# EAGLE board Pedal Box Board rev4 (EAGLE 8.2.1)
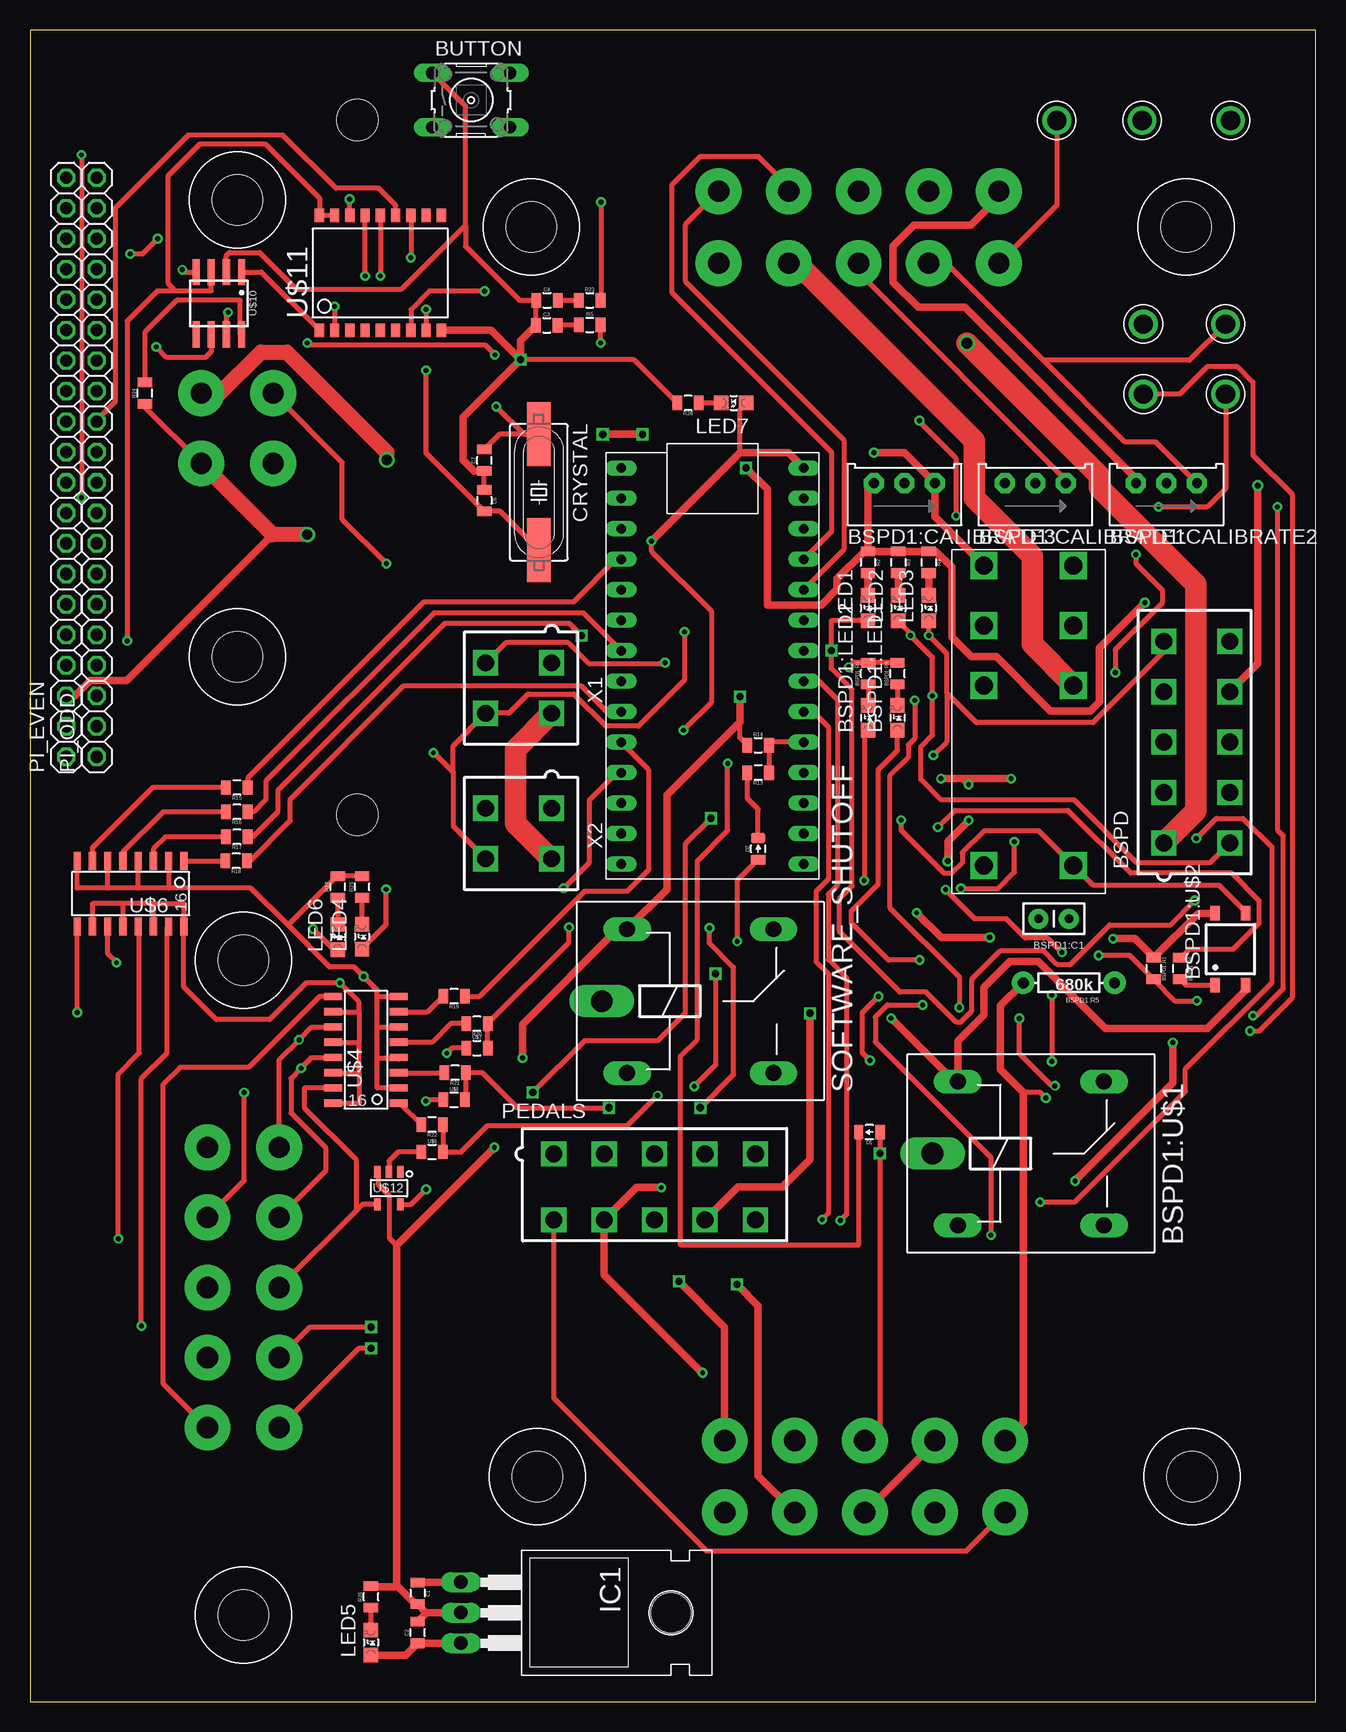
[diagram p0: board, top side]
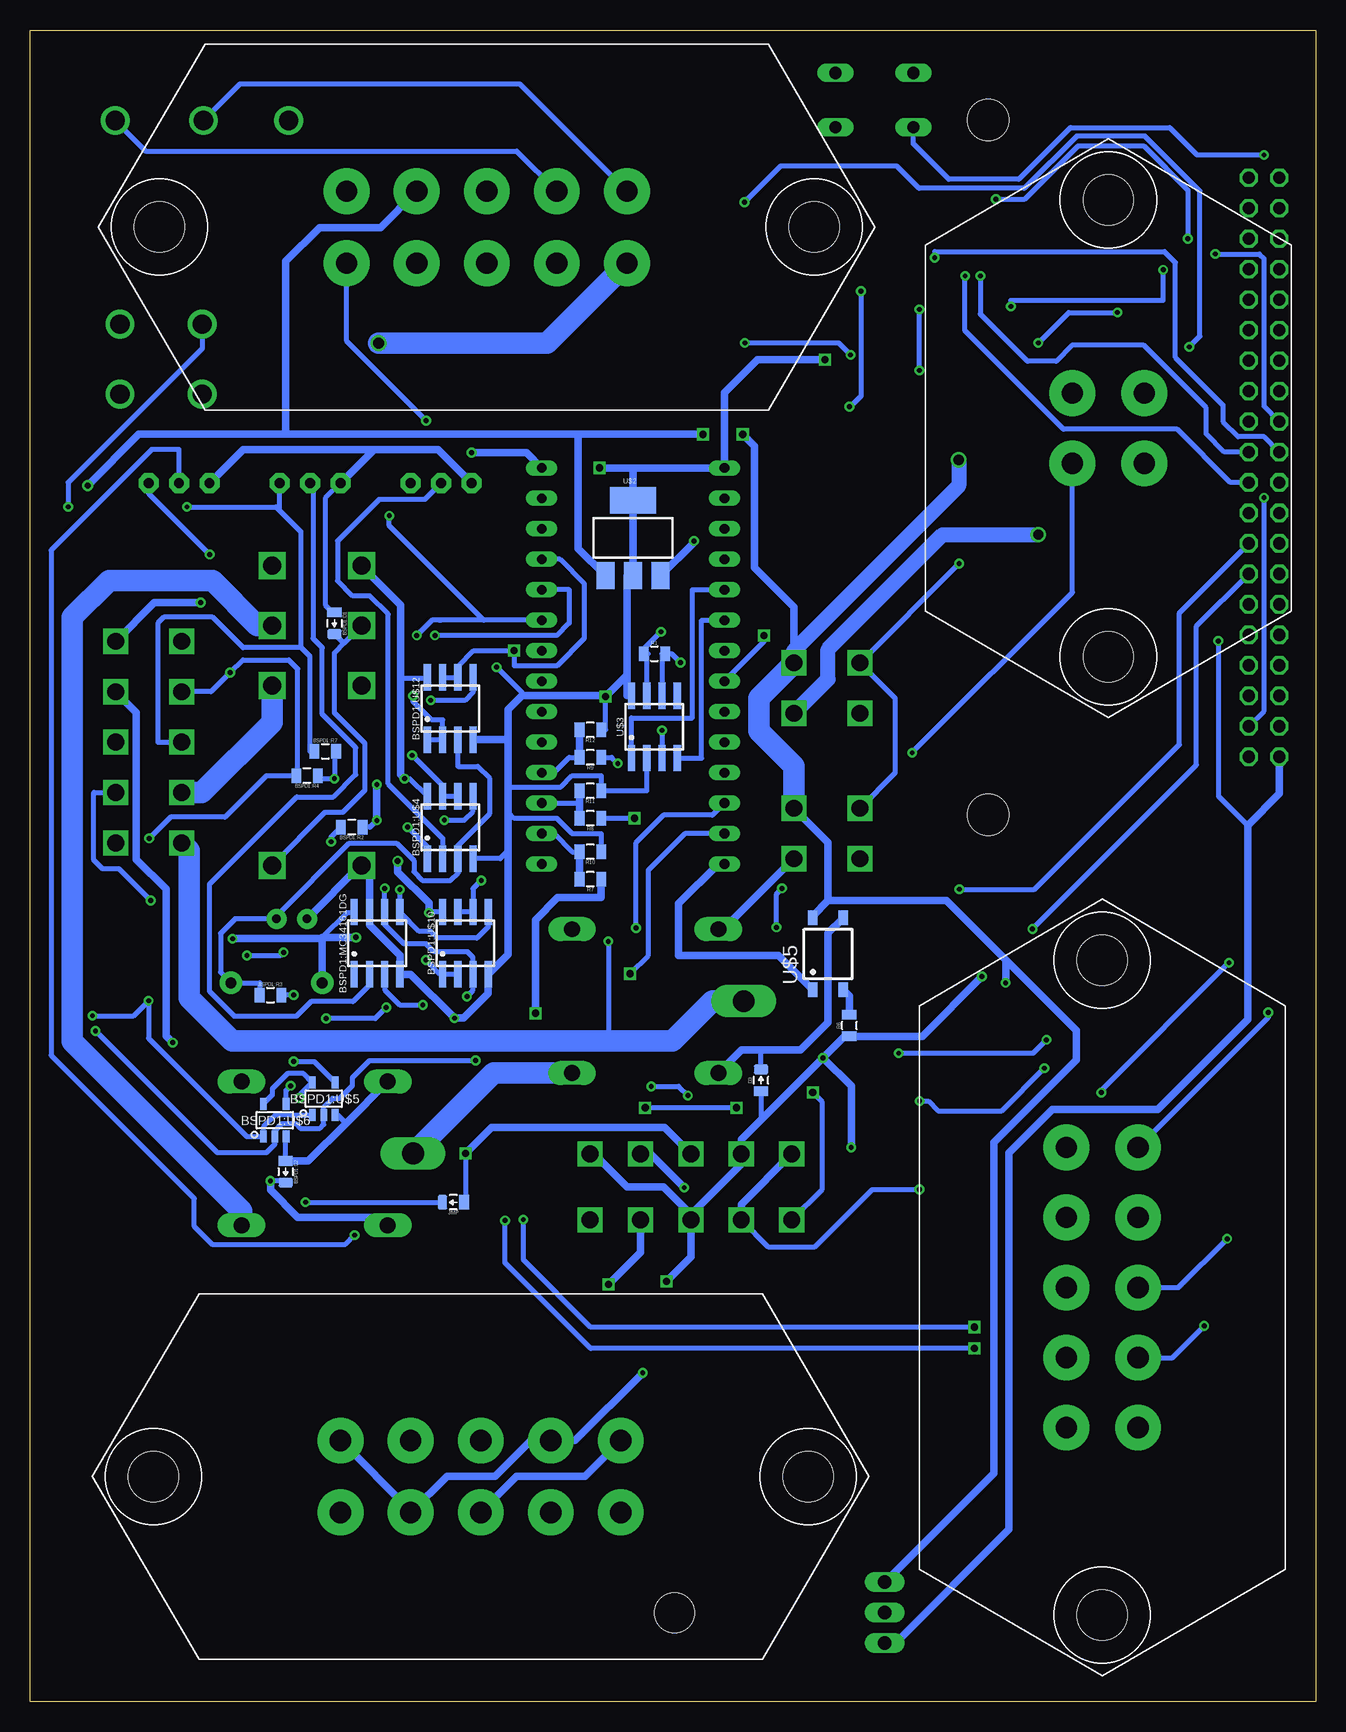
[diagram p1: board, bottom side, seen from below]

Size 107.17 x 139.37 mm. Coordinates in mm from the lower left corner, seen from the top.
Outline: 0,0 107.17,0 107.17,139.37 0,139.37 0,0
Copper layers (1*16): Top 0.035mm / dielectric 1.5mm / Bottom 0.035mm
Design rules "default *": minimum track width 6mil, minimum drill 15mil, track to track 8mil, track to pad 8mil, pad to pad 8mil, via to via 8mil, smd to smd 8mil, copper to edge 40mil, drill to drill 8mil, minimum pad ring 10mil, minimum via ring 8mil, stop-mask expansion 4mil, vias tented up to drill 0mil, thermal gap 10mil
Holes 3.43 mm at 27.28,131.88 27.28,73.96
tKeepout: area 23,69.7 to 31.4,78.1; area 23.1,127.6 to 31.5,136

## Footprints (pad centres in the part's own frame; a part is rotated, then mirrored left to right if it is on the bottom)
MINIFIT_5566-10 = drill 1.4 square: 1 8.4,-2.75; 2 4.2,-2.75; 3 0,-2.75; 4 -4.2,-2.75; 5 -8.4,-2.75; 6 8.4,2.75; 7 4.2,2.75; 8 0,2.75; 9 -4.2,2.75; 10 -8.4,2.75
CAP-PTH-SMALLEZ = drill 0.7 pad 1.651: 1 0,0; 2 2.54,0
TRIMPOT_3296 = drill 0.813 pad 1.676 octagon: 1 2.54,1.27; 2 0,1.27; 3 -2.54,1.27
0805_D = smd 0.8 x 1.2: A -0.9,0; C 0.9,0
LED-805 = smd 1.2 x 1.2: A 0,-1.05; C 0,1.05
SOIC-08 = smd 0.6 x 2.2: 1 -1.905,-2.6; 2 -0.635,-2.6; 3 0.635,-2.6; 4 1.905,-2.6; 5 1.905,2.6; 6 0.635,2.6; 7 -0.635,2.6; 8 -1.905,2.6
0805 = smd 0.8 x 1.2: 1 -0.9,0; 2 0.9,0
AXIAL-0.3EZ = drill 0.9 pad 1.88: P$1 -3.81,0; P$2 3.81,0
ZF112 = drill 1.321 long: 1 4.064,14.884; 2 4.064,2.896; O 16.256,14.884; S 16.256,2.896 | drill 1.803 long: P 1.956,8.89
SOP04 = smd 0.8 x 1.2: 1 -1.27,-3; 2 1.27,-3; 3 1.27,3; 4 -1.27,3
JW2SN = drill 1.5 square: 2 10.008,0; 3 5.004,0; 4 0,0; 5 0,7.493; 6 5.004,7.493; 7 10.008,7.493; COIL+ 25.019,0; COIL- 25.019,7.493
SOT-23-5 = smd 1 x 0.55: 1 -1.35,0.95; 2 -1.35,0; 3 -1.35,-0.95; 4 1.35,-0.95; 5 1.35,0.95
TEST_POINT = drill 1.6: P$1 0,0
B3F-10XX = drill 1.016 long: 1 -3.251,2.261; 2 3.251,2.261; 3 -3.251,-2.261; 4 3.251,-2.261
HC49UP = smd 5.334 x 1.93: 1 -4.826,0; 2 4.826,0
TO-220-H = drill 1.118 long: 1 -2.54,-6.35; 2 0,-6.35; 3 2.54,-6.35 | hole 3.302: 0,11.176
1X20 = drill 1.016 octagon: 1 0,0; 2 2.54,0; 3 5.08,0; 4 7.62,0; 5 10.16,0; 6 12.7,0; 7 15.24,0; 8 17.78,0; 9 20.32,0; 10 22.86,0; 11 25.4,0; 12 27.94,0; 13 30.48,0; 14 33.02,0; 15 35.56,0; 16 38.1,0; 17 40.64,0; 18 43.18,0; 19 45.72,0; 20 48.26,0
TEENSY_3.2_SIMPLE = drill 0.8 long: 3.3V 16.51,29.21; A0 16.51,3.81; A1 16.51,6.35; A2 16.51,8.89; A3 16.51,11.43; A4 16.51,13.97; A5 16.51,16.51; A6 16.51,19.05; A7 16.51,21.59; A8 16.51,24.13; A9 16.51,26.67; AGND 16.51,31.75; D0(RX1) 1.27,31.75; D1(TX1) 1.27,29.21; D2 1.27,26.67; D3(CANTX) 1.27,24.13; D4(CANRX) 1.27,21.59; D5 1.27,19.05; D6 1.27,16.51; D7(RX3) 1.27,13.97; D8(TX3) 1.27,11.43; D9(RX2) 1.27,8.89; D10(TX2) 1.27,6.35; D11 1.27,3.81; D12 1.27,1.27; D13 16.51,1.27; GND 1.27,34.29; VIN 16.51,34.29
SOT223 = smd 1.5 x 2.235: 1 -2.3,-3.15; 2 0,-3.15; 3 2.3,-3.15 | smd 3.8 x 2.2: 4 0,3.15
SOIC-16 = smd 0.61 x 1.524: 1 -4.445,-2.794; 2 -3.175,-2.794; 3 -1.905,-2.794; 4 -0.635,-2.794; 5 0.635,-2.794; 6 1.905,-2.794; 7 3.175,-2.794; 8 4.445,-2.794; 9 4.445,2.667; 10 3.175,2.667; 11 1.905,2.667; 12 0.635,2.667; 13 -0.635,2.667; 14 -1.905,2.667; 15 -3.175,2.667; 16 -4.445,2.667
SOIC-18W = smd 0.762 x 1.143: 1 -5.08,-4.788; 2 -3.81,-4.788; 3 -2.54,-4.788; 4 -1.27,-4.788; 5 0,-4.788; 6 1.27,-4.788; 7 2.54,-4.788; 8 3.81,-4.788; 9 5.08,-4.788; 10 5.08,4.788; 11 3.81,4.788; 12 2.54,4.788; 13 1.27,4.788; 14 0,4.788; 15 -1.27,4.788; 16 -2.54,4.788; 17 -3.81,4.788; 18 -5.08,4.788
MINIFIT_5566-4 = drill 1.4 square: 1 2.1,-2.75; 2 -2.1,-2.75; 3 2.1,2.75; 4 -2.1,2.75
MX150L_VERTICAL-4 = drill 1.778 pad 3.81: 1 -2.921,2.997; 2 2.921,2.997; 3 -2.921,-2.997; 4 2.921,-2.997 | hole 4.191: -19.05,0; 19.05,0
MX150L_VERTICAL-10 = drill 1.778 pad 3.81: 1 -11.684,2.997; 2 -5.842,2.997; 3 0,2.997; 4 5.842,2.997; 5 11.684,2.997; 6 -11.684,-2.997; 7 -5.842,-2.997; 8 0,-2.997; 9 5.842,-2.997; 10 11.684,-2.997 | hole 4.191: -27.292,0; 27.292,0

## Placement (x,y rotation side)
BSPD  MINIFIT_5566-10  [MINIFIT_5566-10]  97.28,80.01 270 top
BSPD1:C1  .47u  [CAP-PTH-SMALLEZ]  86.61,65.28 180 top
BSPD1:CALIBRATE1  [TRIMPOT_3296]  83.82,100.33 0 top
BSPD1:CALIBRATE2  [TRIMPOT_3296]  94.74,100.33 0 top
BSPD1:CALIBRATE3  [TRIMPOT_3296]  72.9,100.33 0 top
BSPD1:D1  DIODE0805  [0805_D]  81.79,89.92 270 bottom
BSPD1:D2  DIODE0805  [0805_D]  85.85,44.2 270 bottom
BSPD1:LED1  [LED-805]  72.31,82.04 0 top
BSPD1:LED2  [LED-805]  69.88,82.04 0 top
BSPD1:MC34161DG  [SOIC-08]  78.23,63.25 0 bottom
BSPD1:R1  10k  [0805]  93.68,61.14 270 top
BSPD1:R2  10k  [0805]  80.34,72.92 180 bottom
BSPD1:R3  330  [0805]  87.12,58.93 0 bottom
BSPD1:R4  10k  [0805]  84.07,77.22 180 bottom
BSPD1:R5  680k  [AXIAL-0.3EZ]  86.61,59.94 180 top
BSPD1:R6  680  [0805]  95.89,61.14 270 top
BSPD1:R7  10k  [0805]  82.55,79.25 0 bottom
BSPD1:R8  330  [0805]  72.31,85.72 90 top
BSPD1:R9  330  [0805]  69.88,85.72 90 top
BSPD1:U$1  G5LE  [ZF112]  73.28,36.83 0 top
BSPD1:U$2  CPC1002N  [SOP04]  100.08,62.74 0 top
BSPD1:U$3  JW2SN-DC5V  [JW2SN]  79.5,94.74 270 top
BSPD1:U$4  MCP6002SOIC  [SOIC-08]  72.14,72.9 0 bottom
BSPD1:U$5  SN74AHC1G09  [SOT-23-5]  82.68,50.29 90 bottom
BSPD1:U$6  SN74LVC1G08  [SOT-23-5]  86.77,48.49 90 bottom
BSPD1:U$10  MCP6002SOIC  [SOIC-08]  70.87,63.25 0 bottom
BSPD1:U$11  TEST_POINT  [TEST_POINT]  92.81,114.86 0 top
BSPD1:U$12  MCP6002SOIC  [SOIC-08]  72.14,82.8 0 bottom
BSPD1:U$13  TEST_POINT  [TEST_POINT]  92.81,109.02 0 top
BUTTON  [B3F-10XX]  36.78,133.53 0 top
C1  .33uF  [0805]  32.31,9.07 270 top
C2  .1uF  [0805]  32.31,5.79 90 top
C3  560pF  [0805]  43.08,114.76 0 top
C4  560pF  [0805]  43.1,116.84 0 top
C6  22pF  [0805]  37.87,100.15 270 top
C7  22pF  [0805]  37.87,103.5 90 top
CRYSTAL  16MHz  [HC49UP]  42.42,100.84 270 top
D1  DIODE0805  [0805_D]  69.98,47.5 180 top
D2  DIODE0805  [0805_D]  60.71,71.12 90 top
D3  DIODE0805  [0805_D]  46.23,51.82 90 bottom
IC1  [TO-220-H]  42.27,7.44 270 top
JMP  DIODE0805  [0805_D]  71.88,41.66 180 bottom
LED1  [LED-805]  69.85,91.19 0 top
LED2  [LED-805]  72.39,91.19 0 top
LED3  [LED-805]  74.93,91.19 0 top
LED4  [LED-805]  27.69,63.78 0 top
LED5  [LED-805]  28.42,4.95 0 top
LED6  [LED-805]  25.68,63.75 0 top
LED7  [LED-805]  58.67,108.28 90 top
PEDALS  MINIFIT_5566-10  [MINIFIT_5566-10]  52.07,42.93 180 top
PI_EVEN  [1X20]  3.02,78.79 90 top
PI_ODD  [1X20]  5.56,78.79 90 top
R1  120  [0805]  55.12,87.38 0 bottom
R2  150  [0805]  69.85,95 270 top
R3  150  [0805]  72.39,95 270 top
R4  150  [0805]  74.93,95 270 top
R5  100  [0805]  46.66,114.78 0 top
R6  100  [0805]  38.86,56.39 90 bottom
R7  10k  [0805]  60.45,68.58 180 bottom
R8  10k  [0805]  60.45,73.66 180 bottom
R9  10k  [0805]  60.45,78.74 180 bottom
R10  15k  [0805]  60.45,70.87 180 bottom
R11  15k  [0805]  60.45,75.95 180 bottom
R12  15k  [0805]  60.45,81.03 180 bottom
R13  43k  [0805]  60.71,77.47 180 top
R14  12k  [0805]  60.71,79.76 0 top
R15  270  [0805]  17.25,76.23 180 top
R16  270  [0805]  17.25,74.19 180 top
R17  270  [0805]  17.25,72.11 180 top
R18  270  [0805]  17.2,70.1 180 top
R19  270  [0805]  35.36,58.83 180 top
R20  270  [0805]  37.26,56.54 180 top
R21  270  [0805]  35.43,52.45 180 top
R22  270  [0805]  33.53,48.13 180 top
R23  100  [0805]  46.66,116.84 0 top
R24  4.7k  [0805]  9.58,109.09 90 top
R25  150  [0805]  27.69,67.94 90 top
R26  150  [0805]  28.42,8.76 90 top
R27  150  [0805]  25.65,67.94 90 top
R28  150  [0805]  54.86,108.28 180 top
SOFTWARE_SHUTOFF  G5LE  [ZF112]  45.72,49.53 0 top
U$1  TEENSY_3.2_SIMPLE  [TEENSY_3.2_SIMPLE]  48.01,68.58 0 top
U$2  [SOT223]  56.9,97.03 0 bottom
U$3  MCP2551  [SOIC-08]  55.12,81.28 0 bottom
U$4  TLP291-4  [SOIC-16]  27.94,54.36 90 top
U$5  CPC1002N  [SOP04]  40.64,62.36 0 bottom
U$6  TLP291-4  [SOIC-16]  8.38,67.31 180 top
U$7  JUMPER  [0805]  37.26,54.51 0 top
U$8  JUMPER  [0805]  35.36,50.19 0 top
U$9  JUMPER  [0805]  33.53,45.85 0 top
U$10  MCP2551  [SOIC-08]  15.75,116.59 180 top
U$11  MCP2515SMD  [SOIC-18W]  29.21,119.13 0 top
U$12  SN74LV1T34  [SOT-23-5]  29.92,42.82 270 top
U$13  TEST_POINT  [TEST_POINT]  99.67,114.86 0 top
U$14  TEST_POINT  [TEST_POINT]  99.67,109.02 0 top
U$15  TEST_POINT  [TEST_POINT]  85.6,131.83 0 top
U$16  TEST_POINT  [TEST_POINT]  92.71,131.83 0 top
U$17  TEST_POINT  [TEST_POINT]  100.08,131.83 0 top
X1  MINIFIT_5566-4  [MINIFIT_5566-4]  40.74,84.51 90 top
X2  MINIFIT_5566-4  [MINIFIT_5566-4]  40.74,72.39 90 top
X3  CONNECTOR-4MX150L_VERTICAL-4  [MX150L_VERTICAL-4]  17.27,106.17 270 bottom
X4  CONNECTOR-10MX150L_VERTICAL-10  [MX150L_VERTICAL-10]  69.6,18.8 0 bottom
X5  CONNECTOR-10MX150L_VERTICAL-10  [MX150L_VERTICAL-10]  69.09,122.94 180 bottom
X6  CONNECTOR-10MX150L_VERTICAL-10  [MX150L_VERTICAL-10]  17.78,34.54 270 bottom

## Library data of the parts
BSPD PEDALS X1 X2 = HyTechDevices; OC_FARNELL: unknown; OC_NEWARK: unknown
BSPD1:C1 BSPD1:CALIBRATE1-BSPD1:CALIBRATE3 BSPD1:D1 BSPD1:D2 BSPD1:LED1 BSPD1:LED2 BSPD1:MC34161DG BSPD1:R1-BSPD1:R9 BSPD1:U$1-BSPD1:U$6 BSPD1:U$10-BSPD1:U$13 C1-C4 C6 C7 D1-D3 IC1 JMP LED1-LED7 PI_EVEN PI_ODD R1-R28 SOFTWARE_SHUTOFF U$1-U$17 X3-X6 = HyTechDevices
BUTTON = HyTechDevices; MPN: B3F-1000; OC_FARNELL: 176432; OC_NEWARK: 36M3542
CRYSTAL = SparkFun-FreqCtrl

## Nets
+5V: BSPD1:CALIBRATE3.1 BSPD1:MC34161DG.8 BSPD1:R1.1 BSPD1:R2.1 BSPD1:R4.1 BSPD1:R5.P$2 BSPD1:R7.2 BSPD1:U$2.4 BSPD1:U$3.4 BSPD1:U$4.8 BSPD1:U$5.5 BSPD1:U$6.5 BSPD1:U$10.8 BSPD1:U$12.8 LED7.A PEDALS.1 PEDALS.4 PEDALS.7 U$1.VIN U$2.3 U$3.3 U$12.5 X4.1 X4.4 X4.7
+5V/1: C2.1 IC1.3 LED5.A PI_EVEN.1 U$10.3 U$11.17 U$11.18
+12V: BSPD1:D2.C BSPD1:U$1.2 BSPD.9 C1.1 IC1.1 U$2.1 U$4.10 U$4.12 U$4.14 U$4.16 U$5.4 U$6.10 U$6.12 U$6.14 U$6.16 X1.1 X2.1 X3.1 X5.9
BSPD1:N$1: BSPD1:D1.C BSPD1:U$2.3 BSPD1:U$3.3 BSPD1:U$3.COIL- BSPD1:U$4.5
BSPD1:N$2: BSPD1:R3.2 BSPD1:U$5.4
BSPD1:N$3: BSPD1:R6.2 BSPD1:U$2.1
BSPD1:N$4: BSPD1:MC34161DG.5 BSPD1:R1.2 BSPD1:U$5.1 BSPD1:U$6.1 BSPD1:U$10.5 BSPD1:U$11.P$1
BSPD1:N$5: BSPD1:CALIBRATE2.2 BSPD1:MC34161DG.3
BSPD1:N$6: BSPD1:CALIBRATE1.2 BSPD1:MC34161DG.2
BSPD1:N$7: BSPD1:CALIBRATE3.2 BSPD1:U$4.2
BSPD1:N$8: BSPD1:LED2.A BSPD1:U$10.6 BSPD1:U$10.7
BSPD1:N$9: BSPD1:R6.1 BSPD1:U$4.1
BSPD1:N$10: BSPD1:U$6.4 BSPD1:U$12.5
BSPD1:N$11: BSPD1:MC34161DG.6 BSPD1:R2.2 BSPD1:U$5.2 BSPD1:U$6.2 BSPD1:U$10.3 BSPD1:U$13.P$1
BSPD1:N$12: BSPD1:LED1.A BSPD1:U$10.1 BSPD1:U$10.2
BSPD1:N$13: BSPD1:C1.1 BSPD1:R3.1 BSPD1:R5.P$1 BSPD1:U$4.3 BSPD1:U$12.3
BSPD1:N$14: BSPD1:LED1.C BSPD1:R8.1
BSPD1:N$15: BSPD1:LED2.C BSPD1:R9.1
BSPD1:SHUTDOWN_C: BSPD1:U$1.S BSPD1:U$3.6
BUT: BUTTON.3 PI_ODD.2
CAN-H: R5.2 U$10.7
CAN-L: R23.2 U$10.6
CS: PI_EVEN.12 U$11.16
GND: BSPD1:C1.2 BSPD1:CALIBRATE1.3 BSPD1:CALIBRATE2.3 BSPD1:CALIBRATE3.3 BSPD1:D1.A BSPD1:D2.A BSPD1:MC34161DG.4 BSPD1:MC34161DG.7 BSPD1:R8.2 BSPD1:R9.2 BSPD1:U$1.1 BSPD1:U$2.2 BSPD1:U$3.COIL+ BSPD1:U$4.4 BSPD1:U$5.3 BSPD1:U$6.3 BSPD1:U$10.4 BSPD1:U$12.4 BSPD.10 BUTTON.1 C1.2 C2.2 C3.1 C4.1 C6.1 C7.1 D3.A IC1.2 PEDALS.2 PEDALS.5 PEDALS.8 PI_EVEN.3 R2.1 R3.1 R4.1 R6.1 R10.1 R11.1 R12.1 R14.1 R24.1 R25.2 R26.2 R27.2 R28.2 SOFTWARE_SHUTOFF.1 U$1.GND U$2.2 U$2.4 U$3.2 U$3.8 U$4.2 U$4.4 U$4.6 U$4.8 U$6.2 U$6.4 U$6.6 U$6.8 U$10.2 U$11.9 U$12.3 X1.2 X2.2 X3.2 X4.2 X4.5 X4.8 X5.10
INT: PI_EVEN.11 U$11.12
LED1: LED4.A PI_ODD.8
LED2: LED6.A PI_ODD.7
MISO: PI_ODD.11 U$11.15
MOSI: PI_ODD.10 U$11.14
N$1: PEDALS.9 R7.1 X4.9
N$2: U$1.D4(CANRX) U$3.4
N$3: R1.2 U$3.6 X1.3 X2.3 X3.3
N$4: R1.1 U$3.7 X1.4 X2.4 X3.4
N$5: U$1.D3(CANTX) U$3.1
N$6: R8.2 R11.2 U$1.A1
N$7: D1.C R9.1
N$8: PEDALS.6 R8.1 X4.6
N$9: R7.2 R10.2 U$1.A0
N$10: R9.2 R12.2 U$1.A2
N$11: D1.A JMP.A PEDALS.3 X4.3
N$12: D3.C SOFTWARE_SHUTOFF.2 U$5.3
N$13: D2.C R13.2
N$14: LED1.C R2.2
N$15: LED2.C R3.2
N$16: LED3.C R4.2
N$17: R21.1 U$1.D10(TX2) U$8.2
N$18: R17.1 U$1.D6
N$19: R15.2 U$6.7
N$20: R15.1 U$1.D2
N$21: R16.1 U$1.D5
N$22: R6.2 U$5.2
N$23: R18.1 U$1.D7(RX3)
N$24: R16.2 U$6.5
N$25: R20.1 U$1.D9(RX2) U$7.2
N$26: R22.1 U$1.D11 U$9.2
N$27: R21.2 U$4.3
N$28: R17.2 U$6.3
N$29: R18.2 U$6.1
N$30: R19.1 U$1.D8(TX3)
N$31: R19.2 U$4.7
N$32: R20.2 U$4.5
N$33: U$1.A5 X6.10
N$34: U$1.A4 X6.9
N$35: R22.2 U$4.1
N$36: U$4.13 U$8.1 X6.7
N$37: U$10.1 U$11.1
N$38: U$4.15 U$12.4 X6.8
N$39: U$10.4 U$11.2
N$40: C6.2 CRYSTAL.2 U$11.8
N$41: R24.2 U$10.8
N$42: C7.2 CRYSTAL.1 U$11.7
N$43: C3.2 R5.1
N$44: U$6.9 X6.1
N$45: U$6.11 X6.2
N$46: U$6.13 X6.3
N$47: U$6.15 X6.4
N$48: U$4.9 X6.5
N$49: U$4.11 U$7.1 X6.6
N$50: C4.2 R23.1
N$51: U$9.1 U$12.2
N$52: LED4.C R25.1
N$53: LED5.C R26.1
N$54: LED6.C R27.1
N$61: LED7.C R28.1
READ_CHARGE: BSPD1:U$12.1 BSPD1:U$12.2 BSPD.6 LED2.A U$1.A8 U$16.P$1 X5.6
READ_FAULT: BSPD1:U$4.6 BSPD1:U$4.7 BSPD.5 LED3.A U$1.A7 U$15.P$1 X5.5
READ_SWITCH: BSPD1:U$12.6 BSPD1:U$12.7 BSPD.7 LED1.A U$1.A9 U$17.P$1 X5.7
READ_UPSTREAM_SHUTDOWN: R13.1 R14.2 U$1.A3
SCK: PI_ODD.12 U$11.13
SHUTDOWN_A: BSPD.1 D2.A SOFTWARE_SHUTOFF.P X5.1
SHUTDOWN_B: BSPD1:U$1.P SOFTWARE_SHUTOFF.S
SHUTDOWN_D: BSPD1:U$3.7 BSPD.2 X5.2
SHUTDOWN_RELAY_CTRL: U$1.D12 U$5.1
SIGNAL_BRAKE: BSPD1:CALIBRATE2.1 BSPD1:R4.2 BSPD.4 JMP.C U$13.P$1 X5.4
SIGNAL_CURRENT: BSPD1:CALIBRATE1.1 BSPD1:R7.1 BSPD.3 U$14.P$1 X5.3

## Tracks (layer width: path | path; a pad name or v marks a point on that pad's centre or on a via)
+5V  (via drill 0.4, 0.45, 0.5)
  Top 0.406: X4.1 81.28,21.84 | v51.82,96.77 51.82,95.91 56.79,90.93 56.79,83.31 v54.48,81 | U$12.5 31.77,41.47 v33.02,42.72 | 59.18,104.14 59.18,107.74 LED7.A | v84.68,50.34 84.23,50.8 82.8,50.8
  Top 0.61: v56.08,27.43 56.03,27.43 47.87,35.59 PEDALS.7 50.57,42.88 v52.63,42.88 | v90.28,63.63 92.09,63.63 BSPD1:R1.1 97.38,65.74 BSPD1:U$2.4 | v78.25,76.48 77.77,76.96 | 77.77,76.96 v75.95,76.96 | 77.77,76.96 v81.79,76.96 | v51.82,96.77 59.18,104.14 63.25,104.14 U$1.VIN | v70.36,104.14 72.9,104.14 BSPD1:CALIBRATE3.1 75.44,98.81 BSPD1:U$3.4 | X4.1 82.8,23.32 82.8,50.8 80.9,52.7 80.9,58.04 BSPD1:R5.P$2 | v80.01,63.73 75.97,63.73 v73.91,65.79 | v76.5,70.08 76.5,71.73 v78.25,73.48
  Bottom 0.406: BSPD1:U$12.8 74.1,85.34 76.28,85.34 | v75.95,76.96 75.5,76.96 BSPD1:U$4.8 74.17,75.5 | BSPD1:R4.1 83.17,76.96 v81.79,76.96 81.79,79.25 BSPD1:R7.2 | BSPD1:U$10.8 73.91,65.85 v73.91,65.79 | BSPD1:MC34161DG.8 80.14,65.79 80.75,65.79 82.8,63.73 | 82.8,59.69 BSPD1:R5.P$2 | v54.48,81 U$3.3 | PEDALS.7 45.64,37.95 41.73,37.95 36.96,42.72 v33.02,42.72 | BSPD1:R2.1 78.82,72.92 v78.25,73.48 | v84.68,50.34 84.68,50.59 BSPD1:U$5.5 84.36,52.38 85.7,52.38 86.96,51.11 86.96,50.59 BSPD1:U$6.5
  Bottom 0.61: PEDALS.7 47.87,41.48 PEDALS.1 | 82.8,63.73 BSPD1:R5.P$2 | v56.08,27.43 61.72,21.79 X4.4 65.41,21.79 68.38,18.82 72.42,18.82 X4.7 75.44,15.95 X4.1 | PEDALS.4 55.43,45.68 v52.63,42.88 | 82.8,63.73 82.91,63.63 v90.28,63.63 | v78.25,73.48 v78.25,76.48 | U$2.3 51.82,96.66 v51.82,96.77 | U$1.VIN 65.79,104.14 v70.36,104.14 | v75.95,76.96 76.28,77.29 76.28,85.34 76.28,91.44 79.5,94.67 BSPD1:U$3.4 | 82.8,63.73 v80.01,63.73 | v76.5,70.08 76.5,69.19 73.91,66.6 v73.91,65.79
+5V/1  (via drill 0.4)
  Top 0.406: 24.09,123.95 U$11.18 | U$11.18 U$11.17 | U$10.3 15.11,117.6 12.17,117.6 | U$11.18 24.13,125.35 19.61,129.87 14.17,129.87 11.53,127.23 11.53,118.24 12.17,117.6 | 12.17,117.6 10.59,117.6 8.1,115.11 v8.1,88.44
  Top 0.61: IC1.3 32.32,4.9 C2.1 31.32,3.9 LED5.A
  Bottom 0.406: v8.1,88.44 8.1,75.51 5.66,73.08
  Bottom 0.61: IC1.3 35.03,4.9 25.55,14.38 25.55,45.77 21.92,49.4 13.16,49.4 5.66,56.9 5.66,73.08 3.02,75.72 PI_EVEN.1
+12V  (via drill 0.4, 0.5, 0.6, 0.85)
  Top 0.406: 10.41,66.55 10.29,66.42 U$6.14 | 10.41,66.55 7.75,66.55 | U$4.12 27.43,54.99 | U$4.14 27.43,52.45 | 27.43,52.45 27.43,49.91 U$4.16 | 10.41,66.55 12.83,66.55 U$6.16 12.83,59.59 15.53,56.88 19.98,56.88 23.04,59.94 v25.83,59.94 27.43,58.34 27.43,57.58 | 7.75,66.55 U$6.12 | U$6.10 5.21,66.55 7.75,66.55 | 27.43,52.45 27.43,54.99 | 27.43,57.58 27.43,54.99 | U$4.10 27.38,57.53 27.43,57.58
  Top 0.61: v51.05,105.66 v47.75,105.66 | BSPD.9 102.36,86.54 v102.36,101.4 | v95.28,54.97 95.28,51.59 v87.12,43.43 | IC1.1 32.32,9.98 C1.1
  Top 1.27: X3.1 15.82,109.09 19.25,112.52 21.41,112.52 29.74,104.19 v29.74,103.53
  Bottom 0.406: v87.12,43.43 85.85,43.43 BSPD1:D2.C
  Bottom 0.61: v51.05,105.66 61.47,105.66 | 61.47,105.66 61.47,96.15 U$2.1 | X1.1 43.49,91.27 46.79,94.56 46.79,104.7 v47.75,105.66 | 61.47,105.66 85.85,105.66 | X5.9 77.95,122.91 83.03,122.91 85.85,120.09 85.85,105.66 | BSPD.9 98.3,82.48 98.3,70.23 95.83,67.77 95.83,55.52 v95.28,54.97 | v87.12,43.43 87.12,42.67 84.84,40.39 78,40.39 BSPD1:U$1.2 | X2.1 40.64,71.64 40.64,66.8 | 40.64,66.8 41.91,65.53 U$5.4 | 25.83,61.85 v25.83,59.94 | IC1.1 26.82,19.07 26.82,46.63 19.94,53.52 19.94,55.96 25.83,61.85 | v102.36,101.4 98.09,105.66 85.85,105.66 | 25.83,61.85 30.79,66.8 40.64,66.8
  Bottom 1.27: v29.74,103.53 29.74,101.37 43.49,87.62 X1.1
  Bottom 1.778: X1.1 46.41,83.7 46.41,80.95 43.49,78.04 X2.1
BSPD1:N$1  (via drill 0.4)
  Top 0.406: BSPD1:U$2.3 101.35,65.86 99.14,68.07 88.65,68.07 BSPD1:U$3.COIL- 84.1,72.62 79.55,72.62 77.72,70.79 77.72,69.95 76.86,69.09 76.2,69.09 72.62,72.67 v72.62,73.51
  Bottom 0.406: 80.94,88.3 81.79,87.45 81.79,82.45 79.25,79.91 79.25,76 81.08,74.17 82.55,74.17 BSPD1:U$3.COIL- | 80.94,88.3 BSPD1:U$3.3 | BSPD1:D1.C 81.08,88.3 80.94,88.3 | BSPD1:U$4.5 70.23,74.24 70.97,73.51 v72.62,73.51
BSPD1:N$2  (via drill 0.4)
  Top 0.406: v85.19,58.93 v85.19,53.39
  Bottom 0.406: v85.19,58.93 BSPD1:R3.2 | v85.19,53.39 83.48,53.39 BSPD1:U$5.4
BSPD1:N$3
  Top 0.406: BSPD1:U$2.1 96.39,59.74 BSPD1:R6.2
BSPD1:N$4  (via drill 0.4)
  Top 0.406: v97.28,58.45 95.4,58.45 93.67,60.17 BSPD1:R1.2 91.68,62.23 v89.08,62.23 | v76.33,67.72 78.77,65.28 81.38,65.28 82.98,63.68 84.84,63.68 v86.03,62.48 | v103.99,99.62 103.99,72.69 104.5,72.19 104.5,59.49 102.21,57.2 v101.96,57.2
  Bottom 0.406: BSPD1:U$10.5 68.96,64.62 69.9,63.68 73.2,63.68 73.76,64.24 74.72,64.24 BSPD1:MC34161DG.5 v76.33,67.72 | BSPD1:U$5.1 85.36,48.94 85.37,48.93 86.7,48.93 87.72,47.92 BSPD1:U$6.1 89.1,47.14 97.28,55.32 v97.28,58.45 98.53,57.2 v101.96,57.2 | v89.08,62.23 86.28,62.23 v86.03,62.48 | BSPD1:U$11.P$1 92.81,112.83 103.99,101.65 v103.99,99.62
BSPD1:N$5  (via drill 0.4)
  Top 0.406: v80.11,38.91 80.11,45.39 70.47,55.03 70.47,57.09 71.49,58.1 v74.42,58.1
  Bottom 0.406: BSPD1:MC34161DG.3 77.6,59.36 76.34,58.1 v74.42,58.1 | BSPD1:CALIBRATE2.2 94.74,104.39 97.03,104.39 105.41,96.01 105.41,53.9 93.47,41.96 93.47,39.62 92,38.15 80.87,38.15 v80.11,38.91
BSPD1:N$6
  Bottom 0.406: BSPD1:MC34161DG.2 78.87,59.77 80.25,58.38 83.73,58.38 84.96,57.15 90.12,57.15 92.2,59.23 92.2,68.17 84.94,75.44 81.86,75.44 80.01,77.29 80.01,79.55 82.8,82.35 82.8,87.88 83.57,88.65 83.57,101.35 BSPD1:CALIBRATE1.2
BSPD1:N$7
  Bottom 0.406: BSPD1:U$4.2 72.77,71.98 77.31,76.52 77.31,90.67 78.84,92.2 80.26,92.2 81.53,93.47 81.53,96.77 78.07,100.24 74.26,100.24 BSPD1:CALIBRATE3.2
BSPD1:N$8  (via drill 0.4)
  Top 0.406: BSPD1:LED2.A 69.55,80.66 v69.55,68.48
  Bottom 0.406: BSPD1:U$10.7 BSPD1:U$10.6 70.23,67.79 v69.55,68.48
BSPD1:N$9  (via drill 0.4)
  Top 0.406: BSPD1:R6.1 96.58,62.74 100.28,62.74 102.44,64.9 102.44,66.83 100.18,69.09 91.77,69.09 86.54,74.32 77.09,74.32 v75.69,72.92
  Bottom 0.406: v75.69,72.92 74.04,71.27 BSPD1:U$4.1
BSPD1:N$10  (via drill 0.4)
  Top 0.406: v73.76,83.49 73.76,80.31 73.23,79.78 73.23,78.74 71.65,77.17 71.65,66.24 77.47,60.43 v77.47,57.89 | v82.47,56.97 82.47,54.08 85.19,51.36 v85.45,51.36
  Bottom 0.406: BSPD1:U$12.5 70.23,84.18 70.92,83.49 v73.76,83.49 | v77.47,57.89 78.38,56.97 v82.47,56.97 | BSPD1:U$6.4 85.82,50.99 v85.45,51.36
BSPD1:N$11  (via drill 0.4)
  Top 0.406: v77.6,67.82 80.72,67.82 82.07,69.16 v82.07,71.7 | v70.03,53.47 69.39,54.1 69.39,57.45 v70.74,58.8 | BSPD1:U$13.P$1 95.86,109.02 98.15,111.3 100.69,111.3 101.96,110.03 101.96,103.94 105.26,100.64 105.26,58.73 102.46,55.93 v101.7,55.93
  Bottom 0.406: v77.6,67.82 BSPD1:MC34161DG.6 77.6,64.8 76,63.2 74.14,63.2 73.47,62.52 70.67,62.52 70.23,62.08 BSPD1:U$10.3 70.23,59.31 v70.74,58.8 | v82.07,71.7 82.07,72.1 BSPD1:R2.2 | v70.03,53.47 78.87,53.47 80.29,52.05 80.29,51.38 81.36,50.32 81.94,50.32 82.68,49.58 BSPD1:U$5.2 82.68,48.13 82.98,47.83 84.63,47.83 85.01,48.21 86.16,48.21 86.77,47.6 BSPD1:U$6.2 86.77,46.48 87.48,45.77 91.54,45.77 v101.7,55.93
BSPD1:N$12  (via drill 0.4)
  Top 0.406: BSPD1:LED1.A 72.31,79.32 70.71,77.72 70.71,68.17 68.48,65.94 68.48,64.95 71.58,61.85 v74.17,61.85
  Bottom 0.406: BSPD1:U$10.2 BSPD1:U$10.1 72.97,60.65 v74.17,61.85
BSPD1:N$13
  Bottom 0.406: BSPD1:R3.1 88.02,59.94 BSPD1:R5.P$1 91.29,60.81 91.29,64.06 90.07,65.28 BSPD1:C1.1 86.61,65.53 80.56,71.59 76.62,71.59 75.16,70.13 75.16,69.19 74.46,68.49 72.1,68.49 72.08,68.48 71.5,69.06 BSPD1:U$4.3 71.5,71.4 68.83,74.07 68.83,76.96 69.85,77.98 71.5,77.98 BSPD1:U$12.3
BSPD1:N$14
  Top 0.406: BSPD1:R8.1 BSPD1:LED1.C
BSPD1:N$15
  Top 0.406: BSPD1:R9.1 BSPD1:LED2.C
BSPD1:SHUTDOWN_C
  Bottom 1.778: BSPD1:U$3.6 88.21,89.74 91.95,93.47 100.58,93.47 103.63,90.42 103.63,88.65 103.63,55.04 89.53,40.95 BSPD1:U$1.S
BUT  (via drill 0.4)
  Top 0.406: v4.29,128.96 v4.29,100.38
  Bottom 0.406: PI_ODD.2 4.29,82.6 v4.29,100.38 | BUTTON.3 33.53,129.87 30.58,126.92 24.74,126.92 20.42,131.24 12.17,131.24 9.88,128.96 v4.29,128.96
CAN-H  (via drill 0.4)
  Top 0.406: U$10.7 16.38,115.82 v16.51,115.82 | v23.11,113.28 23.27,113.13 37.92,113.13 v38.76,112.29 | v47.57,113.28 47.56,113.3 R5.2
  Bottom 0.406: v23.11,113.28 20.57,115.82 v16.51,115.82 | v38.76,112.29 39.75,113.28 v47.57,113.28
CAN-L  (via drill 0.4)
  Top 0.406: U$10.6 15.11,112.57 14.61,112.06 11.4,112.06 v10.52,112.95 | v47.6,125.02 47.6,116.88 R23.2
  Bottom 0.406: v47.6,125.02 44.6,128.02 34.9,128.02 33.05,126.16 24.28,126.16 19.91,130.53 14.22,130.53 9.63,125.93 9.63,113.84 v10.52,112.95
CS  (via drill 0.4)
  Top 0.406: U$11.16 26.64,123.94 v26.64,125.27 | v10.64,121.97 9.37,120.7 v8.36,120.7
  Bottom 0.406: v26.64,125.27 24.23,125.27 19.79,129.72 14.33,129.72 10.64,126.03 v10.64,121.97 | PI_EVEN.12 4.29,108 4.29,120.32 4.67,120.7 v8.36,120.7
GND  (via drill 0.4, 0.6, 0.85)
  Top 0.406: R14.1 59.18,80.38 59.18,81.69 | 9.14,69.98 U$6.4 9.02,67.85 | U$6.2 11.56,67.85 | 30.73,56.13 U$4.6 28.96,56.26 | 14.28,103.38 X3.2 9.58,107.95 R24.1 | 30.73,53.7 U$4.4 | 11.56,67.85 9.02,67.85 | 9.02,67.85 6.48,67.85 | 6.48,67.85 U$6.6 | 6.48,67.85 3.94,67.85 U$6.8 | C6.1 C7.1 | 27.62,68.84 R25.2 R27.2 25.59,68.84 21.5,64.76 | 16.38,119.89 U$10.2 16.36,119.21 16.36,120.57 16.61,120.83 19.15,120.83 22.2,117.78 30.96,117.78 36.3,123.11 | C3.1 42.18,116.81 C4.1 40.79,116.84 36.3,121.34 36.3,123.11 | U$4.2 28.96,51.18 28.96,53.7 | 28.96,53.7 30.73,53.7 | 30.73,53.7 30.73,53.59 | 28.96,53.7 28.96,56.26 | 28.96,56.26 28.96,58.8 | 28.96,58.8 U$4.8 | 28.96,58.8 28.96,59.33 v27.81,60.48 27.03,61.27 24.99,61.27 21.5,64.76 | U$12.3 29.01,44.14 29.01,43.16 29.95,42.22 29.95,38.68 30.56,38.08 | R28.2 50.36,111.89 v40.89,111.89 | BSPD1:R8.2 BSPD1:R9.2 68.64,86.62 v68.28,86.26 | 11.56,67.85 18.41,67.85 21.5,64.76 | BUTTON.1 36.3,133.02 36.3,123.11
  Top 0.61: R2.1 R3.1 R4.1 75.53,95.9 76.83,94.59 76.83,88.77 78.49,87.12 80.54,87.12 85.06,82.6 88.39,82.6 89.15,83.36 89.15,87.86 v92.94,91.64 | X4.2 75.44,21.64 X4.8 | v54.1,35.05 57.91,31.24 X4.5 | v41.06,53.68 41.06,56.48 49,64.41 SOFTWARE_SHUTOFF.1 53.11,67.74 53.11,75.62 59.18,81.69 v59.18,83.82 | v71.78,57 77.06,51.71 BSPD1:U$1.1 77.34,55.12 79.5,57.28 79.5,59.54 81.69,61.72 84.05,61.72 89.64,56.13 98.15,56.13 101.35,59.33 BSPD1:U$2.2 | v40.89,111.89 40.89,113.47 C3.1 | v40.89,111.89 38.44,114.34 U$11.9 | v40.89,111.89 36.09,107.09 36.09,103.53 37.02,102.61 C7.1 | v59.69,102.87 61.47,101.09 61.47,91.44 65.96,91.44 67.28,92.76 67.28,93.62 69.56,95.9 R2.1 | R2.1 69.85,101.09 BSPD1:CALIBRATE3.3 | BSPD1:CALIBRATE2.3 92.2,101.98 77.93,116.26 74.07,116.26 71.96,118.36 71.96,121.36 73.69,123.09 78.44,123.09 80.77,125.42 X5.10 | v38.71,46.23 30.56,38.08 30.56,9.73 30.68,9.6 | IC1.2 33.06,7.44 | 33.06,7.44 C2.2 | 33.06,7.44 33.03,7.44 C1.2 32.12,8.17 30.68,9.6 | R26.2 28.48,9.6 30.68,9.6 | 20.22,97.31 8.05,85.14 5.04,85.14 3.77,83.87 PI_EVEN.3
  Top 1.27: X3.2 20.22,97.31 v23.11,97.31
  Top 1.778: X1.2 40.46,79.39 40.46,73.22 43.39,70.29 X2.2
  Bottom 0.406: R12.1 59.18,81.03 v59.18,83.82 | R10.1 59.55,72.39 61.98,72.39 63.25,73.66 66.8,73.66 67.31,74.17 | U$3.2 55.75,75.95 R11.1 59.55,77.22 61.98,77.22 62.92,76.28 67.31,76.28 | 61.92,83.88 65.66,83.88 | 57.66,85.34 57.4,85.09 | D3.A 46.23,48.51 | BSPD1:D1.A 81.93,90.82 82.55,91.44 82.55,100.33 BSPD1:CALIBRATE1.3 | BSPD1:U$4.4 67.98,70.3 67.31,70.97 | v68.28,86.26 66.17,84.15 66.17,83.88 | BSPD1:D2.A 85.85,47.1 BSPD1:U$6.3 | BSPD1:U$5.3 81.53,48.94 80.82,48.23
  Bottom 0.61: 52.07,40.64 47.87,44.84 PEDALS.2 47.87,46.87 46.23,48.51 v41.06,53.68 | 52.07,40.64 PEDALS.8 52.07,37.08 v54.1,35.05 | 52.07,40.64 54.36,42.93 57.4,42.93 60.15,45.68 PEDALS.5 | 56.9,102.87 U$1.GND 49.28,109.14 46.53,111.89 v40.89,111.89 | 56.9,102.87 U$2.4 U$2.2 57.4,93.88 57.4,85.6 | 57.4,85.6 57.4,85.09 57.4,83.88 U$3.8 | v41.06,53.68 39.25,55.49 R6.1 32.79,55.49 27.81,60.47 v27.81,60.48 | X4.8 66.6,18.8 60.91,18.8 X4.5 | X2.2 49.37,64.41 SOFTWARE_SHUTOFF.1 | 57.4,85.6 v59.18,83.82 59.24,83.88 65.66,83.88 66.17,83.88 67.31,82.74 67.31,80.2 | 67.31,80.2 BSPD1:U$12.4 | 67.31,80.2 67.31,76.28 67.31,74.17 67.31,70.97 67.31,62.3 BSPD1:U$10.4 68.96,59.05 71.02,57 v71.78,57 75.43,60.65 BSPD1:MC34161DG.4 76.33,62.23 78.87,64.77 BSPD1:MC34161DG.7 78.87,69.09 BSPD1:U$3.COIL+ 79.63,69.72 BSPD1:C1.2 | 56.9,102.87 v59.69,102.87 | v92.94,91.64 96.8,91.64 BSPD.10 | BSPD1:CALIBRATE3.3 73.15,104.39 78.49,104.39 | 78.49,104.39 BSPD1:CALIBRATE1.3 | 78.49,104.39 89.41,104.39 BSPD1:CALIBRATE2.3 | v38.71,46.23 38.71,51.33 v41.06,53.68 | BSPD1:U$1.1 80.82,48.23 83.96,45.1 BSPD1:D2.A
  Bottom 1.27: X1.2 40.64,85.27 40.64,87.76 31.09,97.31 v23.11,97.31
INT  (via drill 0.4)
  Top 0.406: U$11.12 v31.75,120.4
  Bottom 0.406: v31.75,120.4 31.75,120.9 12.6,120.9 11.68,119.99 11.68,112.06 7.72,108.1 7.72,106.73 6.45,105.46 4.29,105.46 PI_EVEN.11
LED1  (via drill 0.4)
  Top 0.406: LED4.A 27.69,62.81 29.69,64.82 v29.69,67.74
  Bottom 0.406: v29.69,67.74 23.42,67.74 11.35,79.81 11.35,90.78 PI_ODD.8
LED2  (via drill 0.4)
  Top 0.406: LED6.A 25.33,62.7 v23.6,64.44
  Bottom 0.406: PI_ODD.7 9.92,89.67 9.92,78.12 v23.6,64.44
MISO  (via drill 0.4)
  Top 0.406: v27.94,118.87 U$11.15
  Bottom 0.406: v27.94,118.87 27.94,115.7 24,111.76 21.61,111.76 20.3,113.08 14.33,113.08 9.12,107.87 9.12,105.72 7.59,104.19 PI_ODD.11
MOSI  (via drill 0.4)
  Top 0.406: U$11.14 v29.21,118.87
  Bottom 0.406: v29.21,118.87 29.21,114.3 21.01,106.1 11.53,106.1 7.09,101.65 PI_ODD.10
N$1  (via drill 0.6)
  Top 0.61: v58.93,34.8 60.71,33.02 60.71,18.85 X4.9 63.7,15.8 | v65.02,57.4 65.02,45.21 62.74,42.93 59.02,42.93 PEDALS.9
  Bottom 0.61: R7.1 59.55,67.06 63.17,67.06 65.02,65.2 v65.02,57.4 | PEDALS.9 56.27,37.46 v58.93,34.8
N$2
  Bottom 0.406: U$3.4 51.18,78.68 51.18,90.17 U$1.D4(CANRX)
N$3  (via drill 0.4)
  Top 0.406: X1.3 39.67,88.29 44.86,88.29 46.58,86.57 52.86,86.57 v52.93,86.64 | X3.3 26.04,103.33 26.04,98.57 v29.71,94.89
  Bottom 0.406: U$3.6 54.48,87.38 R1.2 53.67,87.38 v52.93,86.64 | X2.3 35.02,77.46 35.02,83.65 X1.3 v29.71,94.89
N$4  (via drill 0.4)
  Top 0.406: X2.4 35.28,73 35.28,77.5 | 35.28,77.5 35.28,79.7 X1.4 39.92,82.41 41.53,84.02 45.33,84.02 48.01,81.34 50.72,81.34 54.56,85.18 v54.56,89.2 | v33.63,79.12 35.26,77.5 35.28,77.5
  Bottom 0.406: 55.75,87.38 U$3.7 | 55.63,87.38 55.75,87.38 | 55.75,87.38 R1.1 56.02,87.75 v54.56,89.2 | 33.63,79.15 v33.63,79.12 20.27,92.48 X3.4
N$5
  Bottom 0.406: U$3.1 57.02,82.02 51.94,82.02 51.94,92.71 U$1.D3(CANTX)
N$6
  Bottom 0.406: U$1.A1 61.35,74.93
  Bottom 0.61: R11.2 61.35,74.93 R8.2
N$7  (via drill 0.4)
  Top 0.406: D1.C 69.09,38.1 54.23,38.1 54.23,53.85 55.63,55.24 55.63,70.1 58.17,72.64 v58.17,78.23
  Bottom 0.406: R9.1 58.67,78.74 v58.17,78.23
N$8  (via drill 0.6)
  Top 0.406: v41.91,50.8 46.23,55.12 52.32,55.12 54.61,57.4 54.61,71.5 v56.77,73.66 | PEDALS.6 43.67,25.32 56.39,12.6 78.08,12.6 X4.6
  Bottom 0.406: v56.77,73.66 R8.1 | v41.91,50.8 41.15,50.04 41.15,42.7 PEDALS.6
N$9
  Bottom 0.406: U$1.A0 63.5,72.39 61.98,70.87 R10.2
  Bottom 0.61: R10.2 R7.2
N$10
  Bottom 0.406: U$1.A2 63.5,77.47 62.23,78.74 R9.2
  Bottom 0.61: R12.2 R9.2
N$11  (via drill 0.6)
  Top 0.406: D1.A 70.87,47.5 v70.87,45.72 70.87,23.06 X4.3
  Bottom 0.406: JMP.A 70.87,41.66 v70.87,45.72
  Bottom 0.61: PEDALS.3 54.27,47.88 68.71,47.88 v70.87,45.72
N$12
  Bottom 0.406: D3.C 46.23,54.36
  Bottom 0.61: U$5.3 40.64,64.09 40.64,56.64 42.93,54.36 46.23,54.36 47.85,54.36 SOFTWARE_SHUTOFF.2
N$13
  Top 0.406: D2.C 60.71,74.42 59.81,75.32 R13.2
N$14
  Top 0.61: R2.2 LED1.C
N$15
  Top 0.61: LED2.C R3.2
N$16
  Top 0.61: LED3.C R4.2
N$17  (via drill 0.4, 0.6)
  Top 0.406: v48.26,49.53 40.64,49.53 37.72,52.45 R21.1 36.33,50.27 U$8.2 | v56.64,64.52 56.64,63.25 58.65,61.24 58.65,52.3 v55.88,49.53
  Bottom 0.406: U$1.D10(TX2) 50.29,73.91 54.36,73.91 56.64,71.63 v56.64,64.52 | v48.26,49.53 v55.88,49.53
N$18  (via drill 0.6)
  Top 0.406: v45.97,88.9 44.96,89.92 34.59,89.92 20.68,76 20.68,74.22 18.57,72.11 R17.1
  Bottom 0.406: v45.97,88.9 45.97,88.39 U$1.D6
N$19
  Top 0.406: U$6.7 5.21,71.2 10.24,76.22 R15.2
N$20
  Top 0.406: U$1.D2 48.87,95.25 45.31,91.69 32.82,91.69 18.15,77.02 R15.1
N$21
  Top 0.406: U$1.D5 46.13,90.78 33.68,90.78 19.66,76.76 19.66,75.21 18.64,74.19 R16.1
N$22
  Bottom 0.61: U$5.2 38.86,58.85 R6.2
N$23
  Top 0.406: U$1.D7(RX3) 48.08,82.55 45.92,84.71 31.17,84.71 21.69,75.23 21.69,73.46 18.34,70.1 R18.1
N$24
  Top 0.406: U$6.5 7.75,70.84 11.1,74.19 R16.2
N$25  (via drill 0.4)
  Top 0.406: U$1.D9(RX2) 48.92,77.47 46.61,75.16 46.61,69.95 v44.48,67.82 | U$7.2 R20.1 44.93,63.31 v44.93,64.57
  Bottom 0.406: v44.93,64.57 44.93,67.36 v44.48,67.82
N$26  (via drill 0.4, 0.6)
  Top 0.406: R22.1 U$9.2 35.94,45.85 38.1,48.01 49.78,48.01 v52.32,50.55 | v57.15,60.71 57.15,53.09 v55.37,51.31
  Bottom 0.406: U$1.D11 52.58,72.39 55.63,69.34 55.63,62.23 v57.15,60.71 | v55.37,51.31 53.09,51.31 v52.32,50.55
N$27
  Top 0.406: U$4.3 R21.2
N$28
  Top 0.406: U$6.3 10.29,71.09 11.3,72.11 R17.2
N$29
  Top 0.406: U$6.1 R18.2
N$30
  Top 0.406: U$1.D8(TX3) 51.56,77.72 51.56,69.34 49.78,67.56 46.23,67.56 37.49,58.83 R19.1
N$31
  Top 0.406: U$4.7 33.16,57.53 R19.2
N$32
  Top 0.406: U$4.5 33.5,54.99 35.05,56.54 R20.2
N$33  (via drill 0.4, 0.6)
  Top 0.406: v28.45,29.46 27.38,29.46 X6.10 | U$1.A5 65.79,85.09 67.31,83.57 67.31,68.07 66.55,67.31 66.55,61.87 68.07,60.35 68.07,40.64 v67.56,40.13
  Bottom 0.406: v67.56,40.13 67.56,36.6 60.43,29.46 v28.45,29.46
N$34  (via drill 0.4, 0.6)
  Top 0.406: v28.45,31.24 23.32,31.24 X6.9 | U$1.A4 65.28,82.55 66.55,81.28 66.55,68.58 65.53,67.56 65.53,61.72 66.55,60.71 66.55,40.72 v66.04,40.21
  Bottom 0.406: v66.04,40.21 66.04,36.85 60.43,31.24 v28.45,31.24
N$35
  Top 0.406: U$4.1 30.85,49.91 R22.2
N$36  (via drill 0.4)
  Top 0.406: U$4.13 23.5,53.72 v22.61,52.83 21.77,51.99 21.77,49.1 24.64,46.23 24.64,44.25 X6.7 | U$8.1 33.1,50.19 v32.99,50.09
  Bottom 0.406: v22.61,52.83 26.16,49.28 31.47,49.28 32.28,50.09 v32.99,50.09
N$37
  Top 0.406: U$10.1 19.28,119.19 U$11.1
N$38
  Top 0.406: U$4.15 22.86,51.18 22.86,49.53 27.18,45.21 27.18,40.95 | 27.18,40.95 X6.8 | U$12.4 27.71,41.47 27.18,40.95
N$39  (via drill 0.4)
  Top 0.406: v25.4,116.33 U$11.2 | v12.7,119.38 12.89,119.19 U$10.4
  Bottom 0.406: v25.4,116.33 25.4,116.84 12.7,116.84 v12.7,119.38
N$40  (via drill 0.4)
  Top 0.406: v33.02,116.08 U$11.8 | v33.02,111 33.02,104.1 C6.2 39.18,99.25 CRYSTAL.2
  Bottom 0.406: v33.02,111 v33.02,116.08
N$41
  Top 0.406: U$10.8 17.53,113.99 17.53,116.84 12.24,116.84 9.58,114.17 R24.2
N$42  (via drill 0.4)
  Top 0.406: C7.2 39.13,105.66 41.17,105.66 | 41.17,105.66 CRYSTAL.1 | v37.9,117.6 33.27,117.6 31.75,116.08 U$11.7 | v38.86,107.97 41.17,105.66
  Bottom 0.406: v38.86,107.97 38.78,107.97 37.9,108.86 v37.9,117.6
N$43
  Top 0.406: R5.1 45.73,114.76 C3.2
N$44  (via drill 0.4)
  Top 0.406: v3.94,57.48 U$6.9
  Bottom 0.406: X6.1 3.94,57.07 v3.94,57.48
N$45  (via drill 0.4)
  Top 0.406: v7.21,61.62 6.48,62.36 U$6.11 | X6.2 17.86,43.46 v17.86,50.8
  Bottom 0.406: v17.86,50.8 17.86,50.98 v7.21,61.62
N$46  (via drill 0.4)
  Top 0.406: U$6.13 9.12,64.54 9.12,54.08 7.37,52.32 v7.37,38.61
  Bottom 0.406: X6.3 11.43,34.54 v7.37,38.61
N$47  (via drill 0.4)
  Top 0.406: U$6.15 11.43,64.52 11.43,54.1 9.28,51.96 v9.28,31.36
  Bottom 0.406: X6.4 11.94,28.7 v9.28,31.36
N$48
  Top 0.406: U$4.9 24.13,58.8 18.22,52.9 12.51,52.9 11.11,51.5 11.11,26.53 X6.5
N$49  (via drill 0.4)
  Top 0.406: U$4.11 23.5,56.26 v22.43,55.19 20.78,53.54 X6.6 | U$7.1 35.18,54.51 v34.76,54.09
  Bottom 0.406: v34.76,54.09 23.54,54.09 v22.43,55.19
N$50
  Top 0.406: C4.2 R23.1
N$51
  Top 0.406: U$12.2 29.92,45.09 30.68,45.85 U$9.1
N$52
  Top 0.406: LED4.C R25.1
N$53
  Top 0.406: LED5.C R26.1
N$54
  Top 0.406: 25.73,64.85 LED6.C 25.65,64.83 R27.1
N$61
  Top 0.406: LED7.C R28.1
READ_CHARGE  (via drill 0.4)
  Top 0.406: BSPD.6 98.37,69.95 92.28,69.95 87.05,75.18 75.95,75.18 74.26,76.87 74.26,79.6 75.23,80.58 v75.23,83.87 75.23,87.07 v73.41,88.9 73.41,89.12 LED2.A | X5.6 54.65,123.18 54.65,118.38 67.84,105.18 67.84,96.04 U$1.A8
  Bottom 0.406: BSPD1:U$12.1 BSPD1:U$12.2 72.77,81.85 73.69,81.85 75.23,83.4 v75.23,83.87 | U$1.A8 62.23,92.71 62.23,89.92 63.25,88.9 v73.41,88.9 | U$16.P$1 89.66,134.87 66.34,134.87 X5.6
READ_FAULT  (via drill 0.4)
  Top 0.406: v77.22,98.88 77.22,103.63 74.14,106.7 v74.14,106.81 | 76.43,84.1 78.91,81.62 88.61,81.62 94.53,87.55 BSPD.5 | v75.31,78.92 76.43,80.03 76.43,84.1 | U$15.P$1 85.6,124.77 X5.5 | LED3.A v74.93,88.9 76.43,87.4 76.43,84.1
  Bottom 0.406: U$1.A7 69.34,90.17 | v74.14,106.81 80.77,113.44 X5.5 | 69.34,90.17 77.22,98.04 v77.22,98.88 | BSPD1:U$4.6 BSPD1:U$4.7 72.77,76.38 v75.31,78.92 | 69.34,90.17 72.9,90.17 | 72.9,90.17 73.05,90.17 | 72.9,90.17 73.66,90.17 v74.93,88.9
READ_SWITCH  (via drill 0.4, 0.6)
  Top 0.406: LED1.A 66.8,90.14 v66.8,87.63 66.8,86.13 68.53,84.4 68.53,68 67.49,66.95 67.49,64.21 72.52,59.18 74.7,59.18 77.24,56.64 77.57,56.64 78.5,57.57 78.5,60.21 80.87,62.59 84.53,62.59 85.62,61.49 86.72,61.49 90,64.78 95.08,64.78 v97.1,66.8 | X5.7 63.25,126.29 60.71,128.83 55.88,128.83 53.51,126.45 53.51,117.49 66.83,104.17 66.83,97.56 U$1.A9
  Bottom 0.406: U$1.A9 62.99,95.25 60.96,93.22 60.96,88.65 63.25,86.36 66.8,86.36 v66.8,87.63 70.18,87.63 71.5,86.31 BSPD1:U$12.6 BSPD1:U$12.7 | BSPD.7 101.85,75.81 101.85,70.18 101.12,69.44 99.75,69.44 v97.1,66.8 | U$17.P$1 97.54,129.29 66.6,129.29 X5.7
READ_UPSTREAM_SHUTDOWN
  Top 0.406: R13.1 R14.2 61.86,80.01 U$1.A3
SCK
  Top 0.406: U$11.13 30.48,124.77 29.08,126.16 25.5,126.16 21.06,130.61 13.18,130.61 7.09,124.51 7.09,108.38 5.56,106.86 PI_ODD.12
SHUTDOWN_A  (via drill 0.4, 0.9)
  Top 0.406: 60.71,70.1 D2.A 58.95,68.47 v58.95,63.4
  Top 1.778: BSPD.1 97.21,74.28 97.21,93.19 89.15,101.24 89.15,102.21 v78.11,113.26
  Bottom 0.406: v58.95,63.4 58.95,55.11 59.92,55.11
  Bottom 1.778: BSPD.1 93.88,70.96 93.88,58.67 90.3,55.09 88.9,55.09 76.45,55.1 61.8,55.11 59.92,55.11 53.59,55.12 50.29,58.42 SOFTWARE_SHUTOFF.P | X5.1 64.08,113.26 v78.11,113.26
SHUTDOWN_B
  Bottom 1.778: BSPD1:U$1.P 68.53,52.43 SOFTWARE_SHUTOFF.S
SHUTDOWN_D
  Top 1.778: BSPD1:U$3.7 83.57,88.16 83.57,95.5 78.74,100.33 78.74,105.16 63.96,119.94 X5.2
  Bottom 1.778: BSPD.2 92.85,75.81 87,81.66 BSPD1:U$3.7
SHUTDOWN_RELAY_CTRL
  Bottom 0.61: U$1.D12 49.78,69.85 53.09,66.55 53.09,62.23 44.78,62.23 U$5.1
SIGNAL_BRAKE  (via drill 0.4)
  Top 0.406: v97.23,71.98 98.91,73.66 101.12,73.66 103.54,71.23 103.54,59.99 96.32,52.77 96.32,50.9 87.07,41.66 v84.2,41.66 | v92.2,95.65 92.2,94.88 94.39,92.69 94.39,91.62 90.47,87.71 v90.47,85.8 | X5.4 76.38,119.94 84.47,111.85 | 84.47,111.85 91.29,105.03 93.85,105.03 BSPD1:CALIBRATE2.1 | U$13.P$1 96.66,111.85 84.47,111.85
  Bottom 0.406: v84.2,41.66 JMP.C | v97.23,71.98 95.45,73.76 90.91,73.76 87.48,77.19 85,77.19 BSPD1:R4.2 84.84,77.22 84.84,86.11 85.6,86.87 89.41,86.87 v90.47,85.8 92.07,84.21 BSPD.4 | BSPD1:CALIBRATE2.1 97.28,100.74 v92.2,95.65
SIGNAL_CURRENT  (via drill 0.4)
  Top 0.406: X5.3 69.09,119.13 86.36,101.85 BSPD1:CALIBRATE1.1 | U$14.P$1 99.67,101.14 98.15,99.62 v94.08,99.62
  Bottom 0.406: 84.58,87.88 84.58,97.54 86.36,99.31 | BSPD.3 96.52,80.01 96.52,89.92 96.01,90.42 91.95,90.42 89.41,87.88 84.58,87.88 | BSPD1:R7.1 83.82,79.25 83.82,87.12 84.58,87.88 | 86.36,99.31 BSPD1:CALIBRATE1.1 | v94.08,99.62 86.67,99.62 86.36,99.31

## Text on the board
tDocu: HyTech 2017 Front ECU rev4 | Fault | Charge | Switch | Fault Brake | Input Brake | Fault Current | Input Current | SW | CH | FAULT | BR | CUR